# Altium PCB 四进四出三电机.PcbDoc (part 1 of 3)
Units mm, origin at the board's own origin, x right, y up, seen from the top; angles counter-clockwise.
Board outline 122.4 x 87.4 mm, 2 copper layers (Top Layer, Bottom Layer); 150 components, 163 nets, 541 pads, 64 vias.
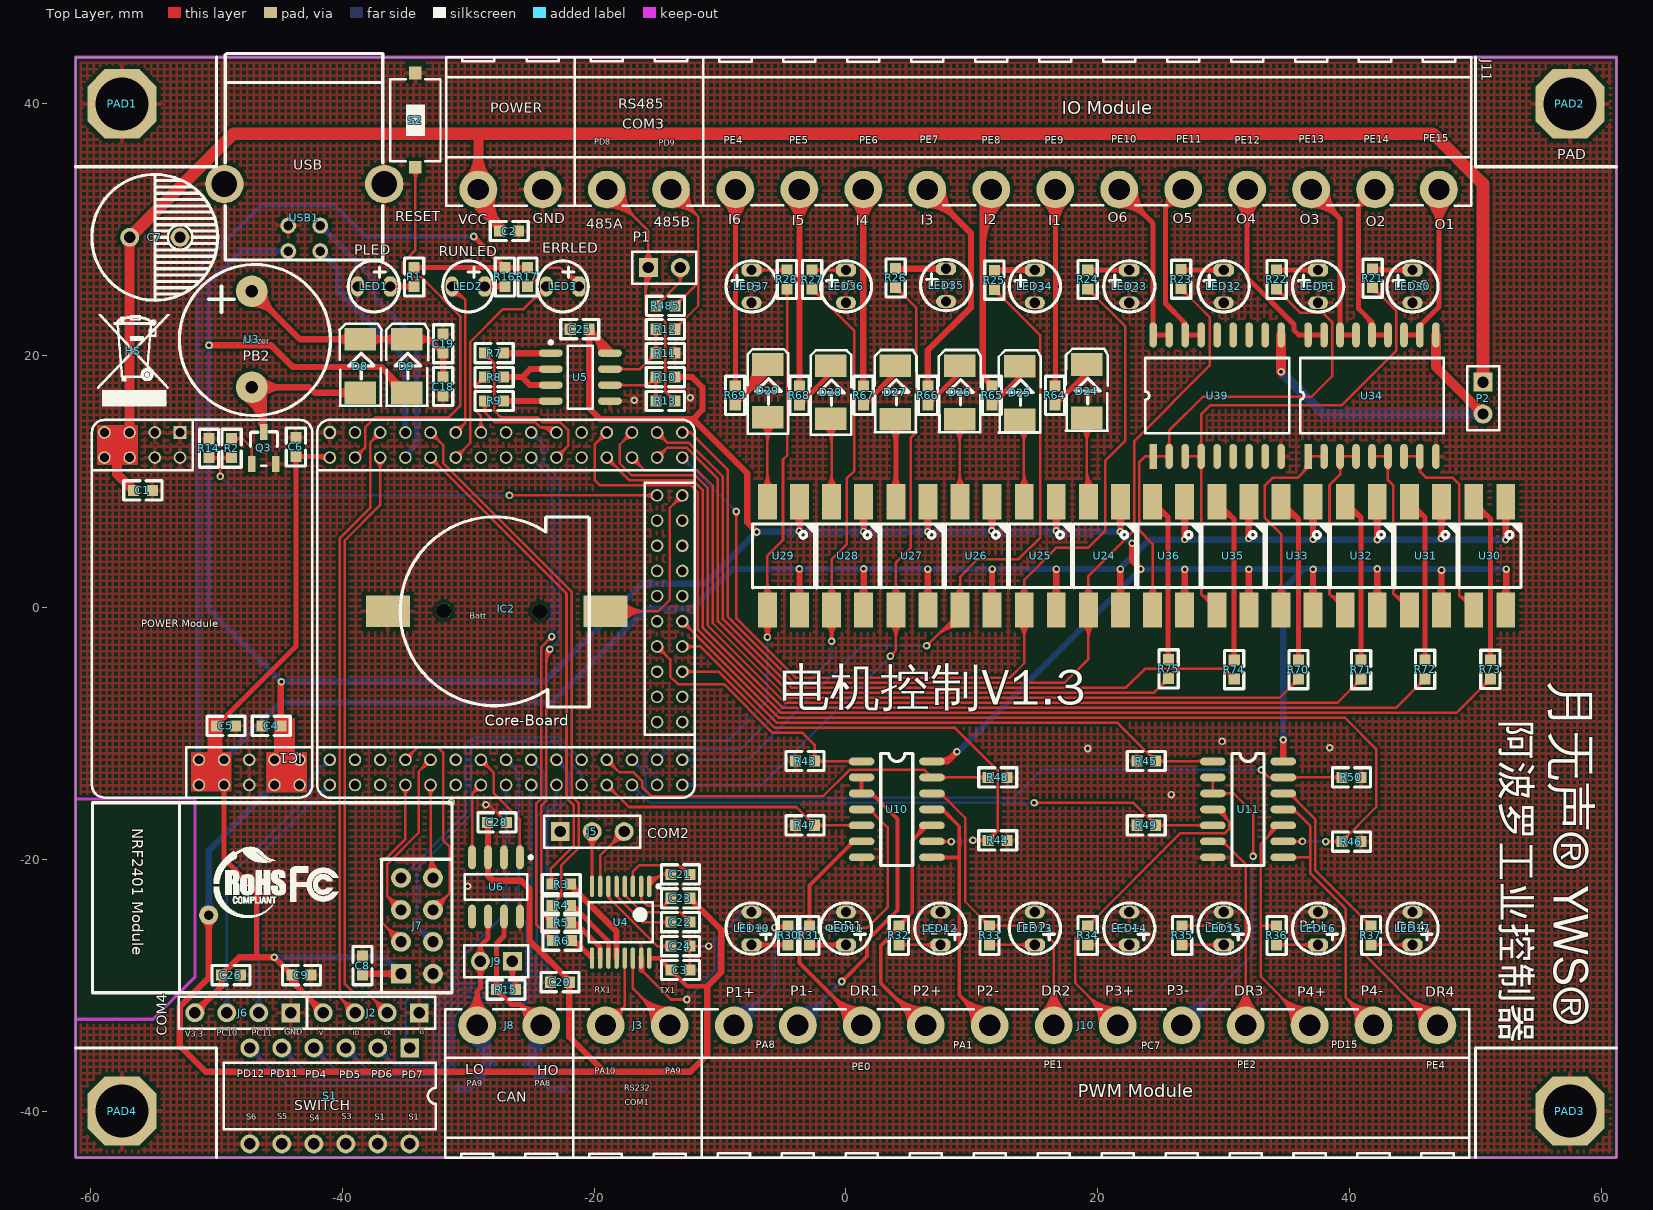
[diagram p0: Top Layer view]
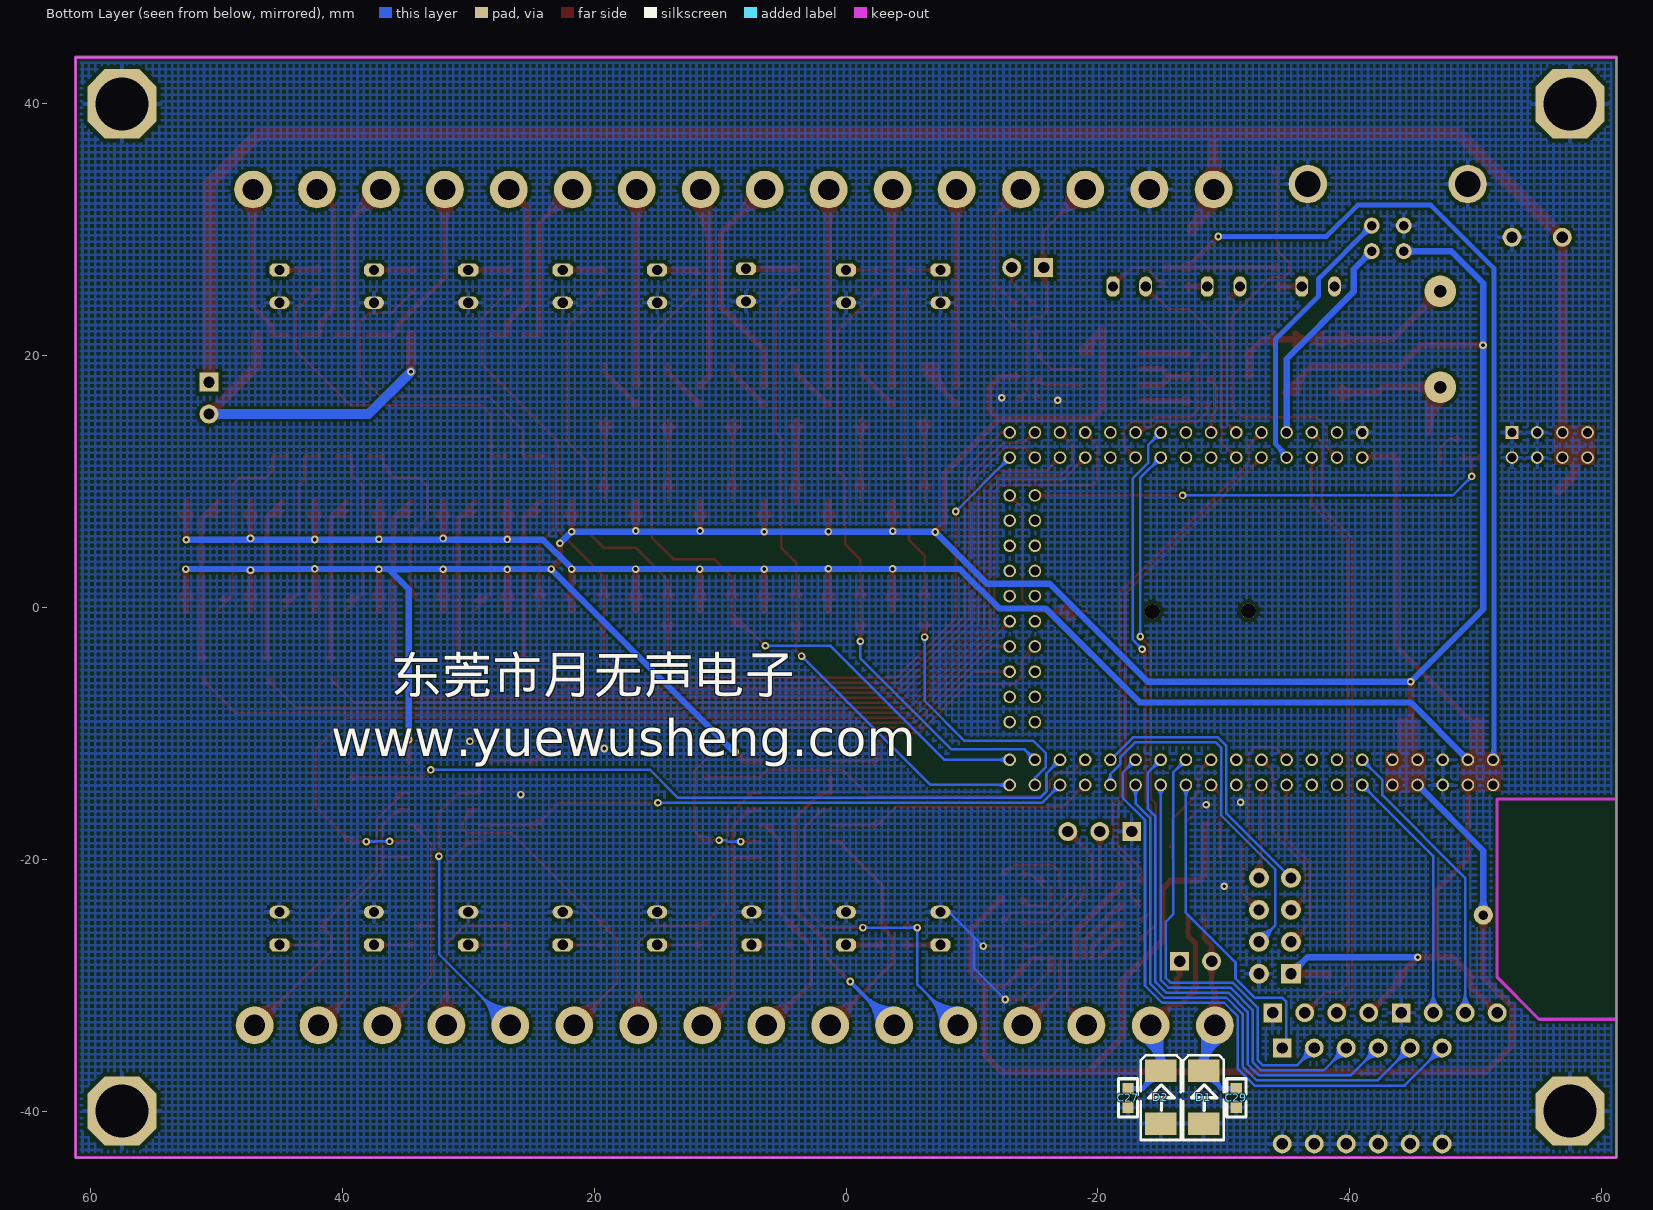
[diagram p1: Bottom Layer view, seen from below]

## Layer stack, top to bottom
Top Layer: signal copper 0.0356
Dielectric: dielectric 0.32, FR-4, Dk 4.8
Bottom Layer: signal copper 0.0356

## Board outline
-61.2,-43.7 61.2,-43.7 61.2,43.7 -61.2,43.7

## Design rules (kind name [scope] priority, off if disabled: settings)
Clearance [(InPadClass('All Pads')) vs InPolygon] p1: gap=0.3
Clearance Clearance_1 [All] p2: gap=0.2
ComponentClearance [All] p1 off: gap=0.254 collisioncheckmode=3 verticalgap=0.254 showdistances=FALSE
PlaneConnect [All] p1: planeconnectstyle=Relief reliefexpansion=0 reliefentries=4 reliefconductorwidth=0.3 reliefairgap=0.508
PolygonConnect PolygonConnect_1 [All vs IsComponentPad] p1: connectstyle=Relief reliefconductorwidth=0.3 reliefentries=4 polygonreliefangle="90 Angle" airgapwidth=0.3
PolygonConnect [All] p2: connectstyle=Direct reliefconductorwidth=0.3 reliefentries=4 polygonreliefangle="90 Angle" airgapwidth=0.3
RoomDefinition 四进四出三电机 [InComponentClass('四进四出三电机')] p1: confinementstyle=ConfineIn formatcopy=TRUE lockcomponents=FALSE outline 63,45.8 -12,45.8 -12,-45.5 63,-45.5
RoutingVias [All] p1: holewidth=0.3 width=0.6 viastyle="Through Hole" minholewidth=0.3 minwidth=0.6 maxholewidth=0.3 maxwidth=0.6
SolderMaskExpansion [All] p1: expansion=0.102
Width [All] p1: maxlimit=2 minlimit=0.16 preferedwidth=0.2 minimp=50.000000 maximp=50.000000 favimp=50.000000
26 further rules are at their usual default settings.

## Classes and differential pairs
component class 四进四出三电机: D24 D25 D26 D27 D28 D29 J10 J11 LED10 LED11 LED12 LED13 LED14 LED15 LED16 LED17 LED30 LED31 LED32 LED33 LED34 LED35 LED36 LED37 P2 R21 R22 R23 R24 R25 R26 R27 R28 R30 R31 R32 R33 R34 R35 R36 R37 R43 R44 R45 R46 R47 R48 R49 R50 R64 R65 R66 R67 R68 R69 R70 R71 R72 R73 R74 R75 U10 U11 U24 U25 U26 U27 U28 U29 U30 U31 U32 U33 U34 U35 U36 U39
component class 公共电路: Batt C1 C2 C3 C4 C5 C6 C7 C8 C9 C18 C19 C20 C21 C22 C23 C24 C25 C26 C27 C28 C29 D1 D2 D8 D9 HS IC1 IC2 J2 J3 J5 J6 J7 J8 J9 LED1 LED2 LED3 P1 PAD1 PAD2 PAD3 PAD4 Q3 R1 R2 R3 R4 R5 R6 R7 R8 R9 R10 R11 R12 R13 R14 R15 R16 R17 R485 RS485 S1 S2 U3 U4 U5 U6 usb1

## Components (designator, comment, footprint, x,y, rotation, side; value= is the part's Value field where it differs from the comment)
Batt "" MINI-BAT -19.1,-0.3 r180 top (schematic designator BATT1)
C1 "104" 0603A -56.6,9.3 r0 top
C2 "104" 0603A -27.5,29.9 r0 top
C3 "104" 0603A -13.9,-28.8 r0 top
C4 "104" 0603A -44.9,-9.4 r180 top
C5 "104" 0603A -50,-9.4 r0 top
C6 "104" 0603A -43.7,12 r90 top
C7 "680UF/50V" 电解电容10mm -56.9,29.4 r270 top
C8 "104" 0603A -38.4,-29.2 r90 top
C9 "104" 0603A -44,-29.2 r0 top
C18 "104" 0603A -32,18.3 r270 top
C19 "104" 0603A -32,20.2 r90 top
C20 "104" 0603A -21.971,-29.769 r180 top
C21 "104" 0603A -13.9,-21.2 r0 top
C22 "104" 0603A -13.9,-25 r0 top
C23 "104" 0603A -13.9,-23.1 r0 top
C24 "104" 0603A -13.9,-26.9 r0 top
C25 "104" 0603A -21.9,22.1 r0 top
C26 "104" 0603A -48.1,-29.2 r180 top
C27 "104" 0603A -22.4,-38.2 r270 bottom
C28 "104" 0603A -26.975,-17.069 r180 top
C29 "102" 0603A -31,-39.7 r90 bottom
D1 "P6KE68A" 贴片二极管#1 -28.4,-36.8 r90 bottom
D2 "P6KE6A" 贴片二极管#1 -25,-36.8 r90 bottom
D8 "RB521S" 贴片二极管#2 -38.5,22.6 r90 top
D9 "RB521S" 贴片二极管#2 -34.8,22.6 r90 top
D24 "4148" 贴片二极管#2 19.2,20.6 r90 top
D25 "4148" 贴片二极管#2 13.868,20.472 r90 top
D26 "4148" 贴片二极管#2 9.1,20.5 r90 top
D27 "4148" 贴片二极管#2 4,20.5 r90 top
D28 "4148" 贴片二极管#1 -1.2,19.2 r90 top
D29 "4148" 贴片二极管#1 -6.2,19.3 r90 top
FC "" fc -44.7,-22 r0 top
HS "" HS -56.602,20.4 r0 top
IC1 "POWER Module" 电源板 -43.4,-14.1 r270 top
IC2 "Core-Board" 核心板-物联网1 -41,13.9 r180 top
J2 "JLink" HDR1X4 -33.9,-32.2 r180 top
J3 "CON2" CON2-5.1卧 -19.1,-33.2 r180 top
J5 "COM2" HDR1X3 -22.7,-17.8 r0 top
J6 "COM4" HDR1X4 -44.1,-32.2 r180 top
J7 "NRF2401 Module" NRF24L01 -32.8,-29.1 r0 top
J8 "CAN" CON2-5.1卧 -29.3,-33.2 r180 top
J9 "" HDR1X2 -26.5,-28.1 r180 top
J10 "PWM Module" CON12-5.1卧 -8.9,-33.2 r180 top
J11 "IO Module" CON12-5.1卧 47.1,33.2 r0 top
LED1 "PLED" LED2.5 -37.5,25.5 r0 top
LED2 "RUNLED" LED2.5 -30,25.5 r0 top
LED3 "ERRLED" LED2.5 -22.5,25.5 r0 top
LED10 "P1+" LED2.5 -7.5,-25.5 r270 top (schematic designator LED18)
LED11 "DR1" LED2.5 0,-25.5 r270 top
LED12 "P2+" LED2.5 7.5,-25.5 r270 top
LED13 "DR2" LED2.5 15,-25.5 r270 top
LED14 "P3+" LED2.5 22.5,-25.5 r270 top
LED15 "DR3" LED2.5 30,-25.5 r270 top
LED16 "P4+" LED2.5 37.5,-25.5 r270 top
LED17 "DR4" LED2.5 45,-25.5 r270 top
LED30 "O5" LED2.5 45,25.5 r90 top
LED31 "O6" LED2.5 37.5,25.5 r90 top
LED32 "I1" LED2.5 30,25.5 r90 top
LED33 "I2" LED2.5 22.5,25.5 r90 top
LED34 "I3" LED2.5 15,25.5 r90 top
LED35 "I4" LED2.5 7.95,25.603 r90 top
LED36 "I5" LED2.5 0,25.5 r90 top
LED37 "I6" LED2.5 -7.5,25.5 r90 top
P1 "" HDR1X2 -15.7,27 r0 top
P2 "" HDR1X2 50.6,17.9 r270 top
PAD1 "PAD" PAD -57.5,40 r0 top
PAD2 "PAD" PAD 57.5,40 r0 top
PAD3 "PAD" PAD 57.5,-40 r0 top
PAD4 "PAD" PAD -57.5,-40 r0 top
POWER "CON2" CON2-5.1卧 -24.1,33.2 r0 top (schematic designator J1)
Q3 "9013" SOT23 -47.2,11.4 r0 top
R1 "300" 0603A -34.3,27 r270 top
R2 "1K" 0603A -48.8,11.9 r90 top
R3 "33" 0603A -23.368,-21.971 r0 top
R4 "33" 0603A -23.368,-23.673 r0 top
R5 "33" 0603A -23.368,-25.044 r0 top
R6 "33" 0603A -23.317,-26.467 r0 top
R7 "33" 0603A -28.7,20.2 r0 top
R8 "33" 0603A -28.7,18.3 r0 top
R9 "33" 0603A -28.7,16.4 r0 top
R10 "100K" 0603A -15.1,18.3 r0 top
R11 "100K" 0603A -15.1,20.2 r0 top
R12 "33" 0603A -15.1,22.1 r0 top
R13 "33" 0603A -15.1,16.4 r0 top
R14 "103" 0603A -50.6,13.4 r270 top
R15 "120" 0603A -27.762,-30.353 r0 top
R16 "160" 0603A -27.1,27 r270 top (schematic designator R38)
R17 "160" 0603A -25.3,27 r270 top (schematic designator R39)
R21 "560" 0603A 41.834,25.4 r90 top
R22 "560" 0603A 34.2,25.3 r90 top
R23 "160" 0603A 26.619,25.324 r90 top
R24 "160" 0603A 19.2,25.3 r90 top
R25 "160" 0603A 11.786,25.248 r90 top
R26 "160" 0603A 3.937,25.425 r90 top
R27 "160" 0603A -2.692,25.298 r90 top
R28 "160" 0603A -4.7,25.3 r90 top
R30 "160" 0603A -4.6,-25.3 r270 top
R31 "160" 0603A -2.9,-25.3 r270 top
R32 "160" 0603A 4.2,-25.3 r270 top
R33 "160" 0603A 11.4,-25.3 r270 top
R34 "160" 0603A 19.2,-25.3 r270 top
R35 "160" 0603A 26.7,-25.3 r270 top
R36 "160" 0603A 34.2,-25.3 r270 top
R37 "160" 0603A 41.7,-25.3 r270 top
R43 "510" 0603A -2.5,-12.2 r180 top
R44 "510" 0603A 11.3,-18.5 r0 top
R45 "510" 0603A 24.6,-12.2 r180 top
R46 "510" 0603A 39.4,-18.6 r0 top
R47 "510" 0603A -2.5,-17.3 r180 top
R48 "510" 0603A 11.3,-13.5 r0 top
R49 "510" 0603A 24.6,-17.3 r180 top
R50 "510" 0603A 39.4,-13.5 r0 top
R64 "160" 0603A 16.6,16.1 r90 top
R65 "160" 0603A 11.6,16.1 r90 top
R66 "160" 0603A 6.5,16.1 r90 top
R67 "160" 0603A 1.4,16.1 r90 top
R68 "160" 0603A -3.7,16.1 r90 top
R69 "160" 0603A -8.8,16.1 r90 top
R70 "51" 0603A 35.941,-5.69 r90 top
R71 "51" 0603A 40.919,-5.69 r90 top
R72 "51" 0603A 45.999,-5.664 r90 top
R73 "51" 0603A 51.181,-5.664 r90 top
R74 "51" 0603A 30.836,-5.69 r90 top
R75 "51" 0603A 25.625,-5.625 r90 top
R485 "120" 0603A -15.088,23.952 r0 top
RS485 "COM3" CON2-5.1卧 -13.9,33.2 r0 top (schematic designator J4)
S1 "SWITCH" DIP-12/SW -41,-38.8 r180 top
S2 "RESRT" SW-PB2 -34.2,38.7 r90 top
U3 "Buzzer" 蜂鸣器 -47.2,21.3 r90 top
U4 "SP3232" TSSOP16 -17.9,-25 r270 top
U5 "SP485" SO8_L -21.1,18.3 r0 top
U6 "TJA1050" SO8_L -27.8,-22.2 r270 top
U10 "74HC04" so-14 3.9,-15.7 r0 top
U11 "74HC04" so-14 31.8,-15.7 r0 top
U24 "TLP521" PC817 21.8,8.1 r270 top
U25 "TLP521" PC817 16.7,8.1 r270 top
U26 "TLP521" PC817 11.6,8.1 r270 top
U27 "TLP521" PC817 6.5,8.1 r270 top
U28 "TLP521" PC817 1.4,8.1 r270 top
U29 "TLP521" PC817 -3.7,8.1 r270 top
U30 "TLP521" PC817 52.4,8.1 r270 top
U31 "TLP521" PC817 47.3,8.1 r270 top
U32 "TLP521" PC817 42.2,8.1 r270 top
U33 "TLP521" PC817 37.1,8.1 r270 top
U34 "ULN2803" SOL18 36.7,12 r90 top
U35 "TLP521" PC817 32,8.1 r270 top
U36 "TLP521" PC817 26.9,8.1 r270 top
U39 "ULN2803" sol18 24.4,12 r90 top
USB1 "USB" USB-B3 -44.3,28.3 r90 top

## Footprints (in the part's own frame and the unit in brackets; to place one, negate y for a bottom-side part, rotate by r counter-clockwise, add the part's x,y. Pads: shape width x height; smd on the part's side, far side on the other; paste and mask are expansions set on the pad)
0603A [mm]
  rect 0.88x0.88 smd: 1(0,0) 2(1.5,0)
  silkscreen extent -0.76,-0.76 2.26,0.76
CON2-5.1卧 [mm]
  round 3 hole 1.7: 1(0,0) 2(-5.1,0)
  silkscreen extent -7.65,-1.28 2.55,10.5
CON12-5.1卧 [mm]
  round 3 hole 1.7: 1(0,0) 2(-5.08,0) 3(-10.16,0) 4(-15.24,0) 5(-20.32,0) 6(-25.4,0) 7(-30.48,0) 8(-35.56,0) 9(-40.64,0) 10(-45.72,0) 11(-50.8,0) 12(-55.88,0)
  silkscreen extent -58.42,-1.28 2.55,10.5
DIP-12/SW [mm] "DIP Switch; 12 Leads"
  rect 1.5x1.5 hole 0.9: 1(-6.35,-3.81)
  round 1.5 hole 0.9: 2(-3.81,-3.81) 3(-1.27,-3.81) 4(1.27,-3.81) 5(3.81,-3.81) 6(6.35,-3.81) 7(6.35,3.81) 8(3.81,3.81) 9(1.27,3.81) 10(-1.27,3.81) 11(-3.81,3.81) 12(-6.35,3.81)
  silkscreen extent -8.43,-2.65 8.41,2.65
fc [mm]
  silkscreen extent -5.53,-2.62 4.36,3
HDR1X2 [mm] "Connector; Header; 2 Position"
  rect 1.5x1.5 hole 0.9: 1(0,0)
  round 1.5 hole 0.9: 2(2.54,0)
  silkscreen extent -1.27,-1.27 3.81,1.27
HDR1X3 [mm] "Connector; Header; 3 Position"
  rect 1.5x1.5 hole 0.9: 1(0,0)
  round 1.5 hole 0.9: 2(2.54,0) 3(5.08,0)
  silkscreen extent -1.27,-1.27 6.35,1.27
HDR1X4 [mm] "Connector; Header; 4 Position"
  rect 1.5x1.5 hole 0.9: 1(0,0)
  round 1.5 hole 0.9: 2(2.54,0) 3(5.08,0) 4(7.62,0)
  silkscreen extent -1.27,-1.27 8.89,1.27
HS [mm]
  silkscreen extent -2.87,-4.39 2.87,2.87
LED2.5 [mil]
  oct 40x63 hole 32: A(51.18,0)
  oval 40x63 hole 32: K(-51.18,0)
  silkscreen extent -80,-80 80,80
MINI-BAT [mm]
  round 1.2 hole 1.2: 0(5.226,0.017) 0(12.863,-0.02)
  rect 3.5x2.5 smd: 1(-0.01,0.007) 2(17.29,0.007)
  silkscreen extent 1.29,-7.49 16.31,7.61
NRF24L01 [mil]
  round 62 hole 35: 1(0,0) 3(0,100) 4(-100,100) 5(0,200) 6(-100,200) 7(0,300) 8(-100,300)
  rect 62x62 hole 35: 2(-100,0)
  silkscreen extent -1065,-59 59,535
PAD [mm]
  oct 5.5x5.5 hole 4.2: 1(0,0)
PC817 [mm]
  rect 2.8x1.5 smd: 1(-0.3,0) 2(-0.3,-2.54) 3(8.3,-2.54) 4(8.3,0)
  silkscreen extent 1.46,-3.72 6.53,1.22
SO8_L [mm] "SOIC, 8-Leads, Body 4.9x3.9mm, Pitch 1.27mm, IPC High Density"
  oval 1.9x0.6 smd: 1(-2.35,1.905) 2(-2.35,0.635) 3(-2.35,-0.635) 4(-2.35,-1.905) 5(2.35,-1.905) 6(2.35,-0.635) 7(2.35,0.635) 8(2.35,1.905)
  silkscreen extent -2.47,-2.5 1,2.88, body extent -2,-2.5 2,2.5, height 1.75
so-14 [mil]
  oval 80x24 smd: 1(-104.65,136.54) 2(-104.65,86.54) 3(-104.65,36.54) 4(-104.65,-13.46) 5(-104.65,-63.46) 6(-104.65,-113.46) 7(-104.65,-163.46) 8(115.35,-163.46) 9(115.35,-113.46) 10(115.35,-63.46) 11(115.35,-13.46) 12(115.35,36.54) 13(115.35,86.54) 14(115.35,136.54)
  silkscreen extent -45,-188 55,162
SOL18 [mm]
  rect 2x0.6 smd: 1(0,0)
  oval 2x0.6 smd: 2(0,-1.27) 3(0,-2.54) 4(0,-3.81) 5(0,-5.08) 6(0,-6.35) 7(0,-7.62) 8(0,-8.89) 9(0,-10.16) 10(9.65,-10.16) 11(9.65,-8.89) 12(9.65,-7.62) 13(9.65,-6.35) 14(9.65,-5.08) 15(9.65,-3.81) 16(9.65,-2.54) 17(9.65,-1.27) 18(9.65,0)
  silkscreen extent 1.83,-10.8 7.82,0.64
sol18 [mm]
  rect 2x0.6 smd: 1(0,0)
  oval 2x0.6 smd: 2(0,-1.27) 3(0,-2.54) 4(0,-3.81) 5(0,-5.08) 6(0,-6.35) 7(0,-7.62) 8(0,-8.89) 9(0,-10.16) 10(9.65,-10.16) 11(9.65,-8.89) 12(9.65,-7.62) 13(9.65,-6.35) 14(9.65,-5.08) 15(9.65,-3.81) 16(9.65,-2.54) 17(9.65,-1.27) 18(9.65,0)
  silkscreen extent 1.83,-10.79 7.82,0.64
SOT23 [mm]
  rect 0.6x1.27 smd: 1(0,0) 2(1.905,0) 3(0.965,2.54)
  silkscreen extent -0.11,-0.13 2.04,2.56, body extent -0.5,0.43 2.42,2.15, height 1.5
SW-PB2 [mm]
  rect 1x1 smd: 1(-3.75,0) 2(3.75,0)
  silkscreen extent -3.25,-2 3.25,2
TSSOP16 [mm] "TSOP, 16-Leads, Body 5x4.4mm, Pitch 0.65mm, IPC Medium Density"
  oval 1.7x0.35 smd: 1(-2.85,2.275) 2(-2.85,1.625) 3(-2.85,0.975) 4(-2.85,0.325) 5(-2.85,-0.325) 6(-2.85,-0.975) 7(-2.85,-1.625) 8(-2.85,-2.275) 9(2.85,-2.275) 10(2.85,-1.625) 11(2.85,-0.975) 12(2.85,-0.325) 13(2.85,0.325) 14(2.85,0.975) 15(2.85,1.625) 16(2.85,2.275)
  silkscreen extent -2.97,-2.55 1.6,3.13, body extent -2.25,-2.55 2.25,2.55, height 1.1
USB-B3 [mil]
  round 50 hole 30: 1(0,0) 2(0,-100) 3(80,-100) 4(80,0)
  round 120 hole 80: 5(210,200) 6(210,-300)
  silkscreen extent -28,-295 618,197
核心板-物联网1 [mm]
  oct 1x1 hole 0.7: 1(0,0)
  round 1 hole 0.7: 2(0,2) 3(-2,0) 4(-2,2) 5(-4,0) 6(-4,2) 7(-6,0) 8(-6,2) 9(-8,0) 10(-8,2) 11(-10,0) 12(-10,2) 13(-12,0) 14(-12,2) 15(-14,0) 16(-14,2) 17(-16,0) 18(-16,2) 19(-18,0) 20(-18,2) 21(-20,0) 22(-20,2) 23(-22,0) 24(-22,2) 25(-24,0) 26(-24,2) 27(-26,0) 28(-26,2) 29(-28,0) 30(-28,2) 31(-26,5) 32(-28,5) 33(-26,7) 34(-28,7) 35(-26,9) 36(-28,9) 37(-26,11) 38(-28,11) 39(-26,13) 40(-28,13) 41(-26,15) 42(-28,15) 43(-26,17) 44(-28,17) 45(-26,19) 46(-28,19) 47(-26,21) 48(-28,21) 49(-26,23) 50(-28,23) 51(-28,26) 52(-28,28) 53(-26,26) 54(-26,28) 55(-24,26) 56(-24,28) 57(-22,26) 58(-22,28) 59(-20,26) 60(-20,28) 61(-18,26) 62(-18,28) 63(-16,26) 64(-16,28) 65(-14,26) 66(-14,28) 67(-12,26) 68(-12,28) 69(-10,26) 70(-10,28) 71(-8,26) 72(-8,28) 73(-6,26) 74(-6,28) 75(-4,26) 76(-4,28) 77(-2,26) 78(-2,28) 79(0,26) 80(0,28)
  silkscreen extent -29,-1 1,29
电源板 [mm]
  round 1 hole 0.7: 1(-2,0) 1(-2,-2) 1(0,0) 1(0,-2) 2(-2,-4) 2(0,-4) 3(-2,-6) 3(-2,-8) 3(0,-6) 3(0,-8) 4(-28,-11.5) 4(-26,-11.5) 4(-26,-9.5) 6(-28,-15.5) 6(-28,-13.5) 6(-26,-15.5) 6(-26,-13.5)
  rect 1x1 hole 0.7: 5(-28,-9.5)
  silkscreen extent -29,-16.5 1,1
电解电容10mm [mm]
  round 1.5 hole 0.9: 1(0,0) 2(0,4)
  silkscreen extent -5,-3 5,7
蜂鸣器 [mm]
  round 2.5 hole 1: 1(3.81,0) 2(-3.81,0)
  silkscreen extent -6.06,-6.25 5.94,5.75
贴片二极管#1 [mm]
  rect 1.8x2.5 smd: A(-4.2,0) K(0,0)
  silkscreen extent -5.5,-1.6 1.22,1.6
贴片二极管#2 [mm]
  rect 1.8x2.5 smd: A(-5.55,0.075) K(-1.3,0.075)
  silkscreen extent -6.58,-1.61 -0.05,1.73

## Part data
Batt: library part Battery, "XH414H"
C1 C2 C3 C4 C5 C6 C8 C9 C18 C19 C20 C21 C22 C23 C24 C25 C26 C27 C28 C29: library part CAP, "Capacitor"
C7: library part "CAPACITOR POL", "Capacitor"
D1 D2 D8 D9 D24 D25 D26 D27 D28 D29: library part 二极管
FC HS: library part PAD
IC1: library part 电源板
IC2: library part 物联网核心板
J2: library part CON4
J5: library part "Header 3", "Header, 3-Pin"
J6: library part "Header 4", "Header, 4-Pin"
J7: library part NRF2401模块
J8 RS485: library part CON2
J9 P1 P2: library part "Header 2", "Header, 2-Pin"
J10 J11: library part "Header 12", "Header, 12-Pin"
LED1 LED2 LED3 LED10 LED11 LED12 LED13 LED14 LED15 LED16 LED17 LED30 LED31 LED32 LED33 LED34 LED35 LED36 LED37: library part LED
Q3: library part NPN
R1 R2 R3 R4 R5 R6 R7 R8 R9 R10 R11 R12 R13 R14 R15 R16 R17 R485: library part RES2
R21 R22 R23 R24 R25 R26 R27 R28 R30 R31 R32 R33 R34 R35 R36 R37 R43 R44 R45 R46 R47 R48 R49 R50 R64 R65 R66 R67 R68 R69 R70 R71 R72 R73 R74 R75: library part Res2, "Resistor"
S1: library part "SW DIP-6", "DIP Switch, 6 Position, SPST"
S2: library part SW-PB
U3: library part 蜂鸣器
U4: library part SP3232EEA
U24 U25 U26 U27 U28 U29 U30 U31 U32 U33 U35 U36: library part TLP521-1, "Single NPN PhotoTransistor OptoCoupler."
USB1: library part "HEADER 3X2"

## Free pads (board coordinates)
  round 1.524 hole 0.762: 0(-50.622,-24.435)

## Via types
v1: diameter 0.6, hole 0.3, Top Layer to Bottom Layer, 64 vias

## Nets (pads, with @x,y where several pads share a name; then routed paths per layer and width w, separated by ;. In a path a pad name is that pad's centre, name@x,y a point inside that pad or via, vN(x,y) a via of type N, cw(c..) or ccw(c..) an arc to the next point about the centre after c; other vN are vias at no path point)
485A: P1.1 R13.2 RS485.2 | length 46.9
  Top Layer w0.2: RS485.2@-19,31.8 cw(c-19,28.42) -16.61,30.81 cw(c-14.22,33.2) RS485.2@-17.6,33.2 ; RS485.2@-19,32 cw(c-19,29.103) -16.951,31.151 cw(c-14.903,33.2) RS485.2@-17.8,33.2 ; RS485.2@-19,32.2 cw(c-19,29.786) -17.293,31.493 cw(c-15.586,33.2) RS485.2@-18,33.2 ; RS485.2@-19,32.4 cw(c-19,30.469) -17.634,31.834 cw(c-16.269,33.2) RS485.2@-18.2,33.2 ; RS485.2@-19,33.2 -15.7,29.9 P1.1@-15.7,27 -15.926,26.774 -15.926,23.444 -15.57,23.089 -14.764,23.089 -14.34,22.664 -14.34,18.884 -14.36,18.864 -14.36,17.16 R13.2@-13.6,16.4 ; P1.1@-16.16,26.54 cw(c-16.724,25.976) -15.926,25.976 ; P1.1@-16.16,27.46 ccw(c-17.269,28.569) -15.7,28.569 ccw(c-14.131,28.569) P1.1@-15.24,27.46 ; P1.1@-16.018,27.318 ccw(c-16.786,28.086) -15.7,28.086 ccw(c-14.614,28.086) P1.1@-15.382,27.318 ; -15.926,24.886 cw(c-13.586,24.886) P1.1@-15.24,26.54 ; -15.926,25.369 cw(c-14.069,25.369) P1.1@-15.382,26.682 ; -15.926,25.851 cw(c-14.551,25.851) P1.1@-15.523,26.823 ; R13.2@-13.94,16.4 ccw(c-14.761,16.4) -14.18,16.98 ccw(c-13.6,17.561) R13.2@-13.6,16.74
485B: R12.2 R485.2 RS485.1 | length 32.2
  Top Layer w0.2: RS485.1@-13.9,33.2 -11.735,31.035 ; RS485.1@-13.842,32.402 cw(c-13.733,30.893) -12.663,31.963 cw(c-11.593,33.033) RS485.1@-13.102,33.142 ; RS485.1@-13.828,32.203 cw(c-13.691,30.316) -12.354,31.654 cw(c-11.016,32.991) RS485.1@-12.903,33.128 ; RS485.1@-13.813,32.003 cw(c-13.649,29.739) -12.044,31.344 cw(c-10.439,32.949) RS485.1@-12.703,33.113 ; RS485.1@-13.799,31.804 cw(c-13.608,29.162) -11.735,31.035 ; R12.2@-13.6,22.1 -11.735,23.965 -11.735,25.781 ; R12.2@-13.6,22.44 ccw(c-13.6,23.261) -13.02,22.68 ccw(c-12.439,22.1) R12.2@-13.26,22.1 ; R485.2@-13.588,23.952 -11.759,25.781 -11.735,25.781 ; R485.2@-13.588,24.292 ccw(c-13.588,25.113) -13.007,24.533 ccw(c-12.427,23.952) R485.2@-13.248,23.952 ; RS485.1@-12.504,33.099 ccw(c-9.862,32.908) -11.735,31.035 ; -11.735,25.781 -11.735,31.035
+3.3V: C5.1 C6.1 C8.1 C9.1 C26.2 IC1.3 IC2.2 J2.4 J6.4 J7.2 R1.1 R16.1 R17.1 U24.4 U25.4 U26.4 U27.4 U28.4 U29.4 U30.1 U31.1 U32.1 U33.1 U35.1 U36.1 | length 356.9
  Top Layer w0.4: IC1.3@-51.4,-14.1 -50.4,-13.1 ; IC1.3@-51.4,-13.8 ccw(c-51.4,-13.076) -50.888,-13.588 ccw(c-50.376,-14.1) IC1.3@-51.1,-14.1 ; IC1.3@-51.4,-12.4 cw(c-51.4,-13.124) -50.888,-12.612 cw(c-50.376,-12.1) IC1.3@-51.1,-12.1 ; IC1.3@-51.4,-12.1 -50.4,-13.1 ; -50.4,-10.945 cw(c-48.455,-10.945) C5.1@-49.83,-9.57 ; -50.4,-9.979 cw(c-49.421,-9.979) C5.1@-50.113,-9.287 ; C5.1@-50,-9.16 ccw(c-50,-8.581) -49.59,-8.99 ccw(c-49.181,-9.4) C5.1@-49.76,-9.4 ; IC1.3@-49.7,-14.1 ccw(c-50.424,-14.1) -49.912,-13.588 ccw(c-49.4,-13.076) IC1.3@-49.4,-13.8 ; IC1.3@-49.7,-12.1 cw(c-50.424,-12.1) -49.912,-12.612 cw(c-49.4,-13.124) IC1.3@-49.4,-12.4 ; IC1.3@-49.612,-14.312 cw(c-50.124,-14.824) -49.4,-14.824 cw(c-48.676,-14.824) IC1.3@-49.188,-14.312 ; IC1.3@-49.476,-14.151 -49.476,-14.024 -50.4,-13.1 ; IC1.3@-49.4,-14.1 -49.4,-19.967 -46.808,-22.559 -46.808,-27.788 ; IC1.3@-49.4,-12.1 -50.4,-13.1 ; C6.1@-43.87,11.83 cw(c-44.279,11.421) -43.7,11.421 cw(c-43.121,11.421) -43.53,11.83 cw(c-43.121,11.421) -43.121,12 cw(c-43.121,12.579) C6.1@-43.53,12.17 ; -41.966,12 cw(c-41.966,10.934) IC2.2@-41.212,11.688 ; IC2.2@-41.1,12 C6.1@-43.7,12 -43.7,-3.1 C5.1@-50,-9.4 -50.4,-9.8 -50.4,-13.1 ; R1.1@-34.3,27 R16.1@-27.33,27 ; R1.1@-34.13,26.83 cw(c-33.721,26.421) -33.721,27 cw(c-33.721,27.579) R1.1@-34.13,27.17 ; v1(-29.565,29.465) R16.1@-27.1,27 R17.1@-25.3,27 ; R16.1@-27.34,27 ccw(c-27.919,27) -27.51,27.41 ccw(c-27.1,27.819) R16.1@-27.1,27.24 ; R16.1@-27.27,26.83 ccw(c-27.679,26.421) -27.679,27 ccw(c-27.679,27.579) R16.1@-27.27,27.17 ; R16.1@-26.93,26.83 cw(c-26.521,26.421) -26.521,27 cw(c-26.521,27.579) R16.1@-26.93,27.17 ; R17.1@-25.47,26.83 ccw(c-25.879,26.421) -25.879,27 ccw(c-25.879,27.579) R17.1@-25.47,27.17
  Top Layer w0.5: J6.4@-51.72,-32.2 -49.6,-30.08 C26.2@-49.6,-29.2 ; J6.4@-51.72,-31.7 ccw(c-51.72,-30.493) -50.866,-31.346 ccw(c-50.013,-32.2) J6.4@-51.22,-32.2 ; C26.2@-49.734,-29.334 cw(c-50.059,-29.659) -49.6,-29.659 cw(c-49.141,-29.659) C26.2@-49.466,-29.334 ; C26.2@-49.608,-29.192 -48.204,-27.788 -46.808,-27.788 v1(-45.412,-27.788) C9.1@-44,-29.2 -44,-29.72 J2.4@-41.52,-32.2 ; C26.2@-49.41,-29.2 cw(c-48.912,-29.2) C26.2@-49.264,-28.848 ; C9.1@-44.19,-29.2 ccw(c-44.649,-29.2) -44.324,-28.876 ccw(c-44,-28.551) C9.1@-44,-29.01 ; C9.1@-44.134,-29.334 cw(c-44.459,-29.659) -44,-29.659 cw(c-43.541,-29.659) C9.1@-43.866,-29.334 ; C9.1@-43.81,-29.2 ccw(c-42.096,-29.2) -43.308,-30.412 ; J2.4@-42.02,-32.2 ccw(c-43.227,-32.2) -42.374,-31.346 ccw(c-41.52,-30.493) J2.4@-41.52,-31.7 ; C8.1@-38.4,-29.1 J7.2@-35.34,-29.1 ; C8.1@-38.266,-29.334 cw(c-37.7,-29.9) -37.7,-29.1 ; J7.2@-35.72,-29.48 ccw(c-36.637,-30.397) -36.637,-29.1 ccw(c-36.637,-27.803) J7.2@-35.72,-28.72 ; U29.4@-4.054,0.804 ccw(c-4.907,1.657) -3.7,1.657 ccw(c-2.493,1.657) U29.4@-3.346,0.804 ; U29.4@-3.7,-0.2 v1(-3.7,3.065) ; U28.4@1.046,0.804 ccw(c0.193,1.657) 1.4,1.657 ccw(c2.607,1.657) U28.4@1.754,0.804 ; U28.4@1.4,-0.2 v1(1.4,3.07) ; U27.4@6.146,0.804 ccw(c5.293,1.657) 6.5,1.657 ccw(c7.707,1.657) U27.4@6.854,0.804 ; U27.4@6.5,-0.2 v1(6.5,3.046) ; U26.4@11.246,0.804 ccw(c10.393,1.657) 11.6,1.657 ccw(c12.807,1.657) U26.4@11.954,0.804 ; U26.4@11.6,-0.2 11.6,3.04 v1(11.608,3.048) ; U25.4@16.346,0.804 ccw(c15.493,1.657) 16.7,1.657 ccw(c17.907,1.657) U25.4@17.054,0.804 ; U25.4@16.7,-0.2 16.7,3.035 v1(16.713,3.048) ; U24.4@21.446,0.804 ccw(c20.609,1.641) 21.793,1.641 ; 21.793,1.673 ccw(c23.023,1.673) U24.4@22.154,0.804 ; v1(21.793,3.048) 21.793,-0.193 U24.4@21.8,-0.2 ; U36.1@26.546,7.396 cw(c25.693,6.543) 26.9,6.543 cw(c28.107,6.543) U36.1@27.254,7.396 ; v1(26.9,5.409) U36.1@26.9,8.4 ; U35.1@31.646,7.396 cw(c30.793,6.543) 32,6.543 cw(c33.207,6.543) U35.1@32.354,7.396 ; v1(32,5.482) U35.1@32,8.4 ; U33.1@36.746,7.396 cw(c35.893,6.543) 37.1,6.543 cw(c38.307,6.543) U33.1@37.454,7.396 ; v1(37.1,5.42) U33.1@37.1,8.4 ; U32.1@41.846,7.396 cw(c40.993,6.543) 42.2,6.543 cw(c43.407,6.543) U32.1@42.554,7.396 ; v1(42.2,5.4) U32.1@42.2,8.4 ; U31.1@46.946,7.396 cw(c46.093,6.543) 47.3,6.543 cw(c48.507,6.543) U31.1@47.654,7.396 ; v1(47.3,5.481) U31.1@47.3,8.4 ; U30.1@52.046,7.396 cw(c51.193,6.543) 52.4,6.543 cw(c53.607,6.543) U30.1@52.754,7.396 ; v1(52.4,5.385) U30.1@52.4,8.4
  Bottom Layer w0.4: IC1.3@-51.612,-11.888 ccw(c-51.978,-11.522) -51.46,-11.522 ; -51.46,-11.23 ccw(c-50.53,-11.23) IC1.3@-51.188,-11.888 ; IC1.3@-51.4,-12.1 -51.46,-12.04 -51.46,26.949 -46.457,31.953 -40.64,31.953 -38.152,29.465 v1(-29.565,29.465)
  Bottom Layer w0.5: IC1.3@-49.4,-12.1 -44.844,-7.544 -23.317,-7.544 -15.85,-0.076 -12.167,-0.076 -9.042,3.048 v1@6.502,3.048 ; IC1.3@-49.4,-11.85 ccw(c-49.4,-11.246) -48.973,-11.673 ccw(c-48.546,-12.1) IC1.3@-49.15,-12.1 ; v1(-45.412,-27.788) -36.652,-27.788 J7.2@-35.34,-29.1 ; J7.2@-35.877,-29.1 ccw(c-37.175,-29.1) -36.257,-28.183 ccw(c-35.34,-27.265) J7.2@-35.34,-28.563 ; v1(6.5,3.046) v1@6.502,3.048 ; v1(26.9,5.409) v1@26.924,5.385 ; 31.644,5.385 ccw(c31.644,5.838) v1@31.965,5.518 ; v1@31.953,5.385 v1@26.924,5.385 ; v1@32,5.385 v1@37.135,5.385 ; v1@32.035,5.518 ccw(c32.356,5.838) 32.356,5.385 ; v1(37.1,5.42) v1@37.135,5.385 ; v1(42.2,5.4) v1@42.215,5.385 ; 46.947,5.385 ccw(c46.947,5.834) v1@47.265,5.517 ; v1@47.3,5.385 v1@42.215,5.385 ; v1(47.3,5.481) v1@47.346,5.436 ; v1@47.335,5.517 ccw(c47.653,5.834) 47.653,5.385 ; v1@47.346,5.385 v1(52.4,5.385) ; v1@6.502,3.048 v1(11.608,3.048) v1(16.713,3.048) v1(21.793,3.048) 21.793,3.099 24.079,5.385 v1@26.924,5.385 ; v1@37.135,5.385 v1@42.215,5.385
+5V: C3.1 C4.1 C20.1 C23.2 C25.2 C28.2 D9.A IC1.1 pad.0 R10.2 U4.16 U5.8 U6.3 U10.14 U11.14 U24.1 U25.1 U26.1 U27.1 U28.1 U29.1 U30.4 U31.4 U32.4 U33.4 U35.4 U36.4 USB1.1 | length 446
  Top Layer w0.35: U4.16@-15.625,-27.85 -14.85,-27.85 C3.1@-13.9,-28.8 -12.601,-30.099 -11.024,-30.099 ; C3.1@-14.165,-28.8 ccw(c-14.805,-28.8) -14.352,-28.348 ccw(c-13.9,-27.895) C3.1@-13.9,-28.535 ; C3.1@-13.9,-29.065 cw(c-13.9,-29.705) -13.448,-29.252 cw(c-12.995,-28.8) C3.1@-13.635,-28.8
  Top Layer w0.5: pad.0@-50.984,-24.797 cw(c-51.858,-25.671) -50.622,-25.671 cw(c-49.386,-25.671) pad.0@-50.26,-24.797 ; pad.0@-50.622,-24.435 -50.622,-29.413 -52.209,-31 -52.217,-31 -52.92,-31.703 -52.92,-34.812 -50.851,-36.881 -19.202,-36.881 ; v1(-50.597,20.828) -45.669,20.828 -43.942,19.101 -36.926,19.101 D9.A@-34.875,17.05 ; IC1.1@-45.4,-14.1 -44.4,-13.1 ; IC1.1@-45.4,-13.85 ccw(c-45.4,-13.246) -44.973,-13.673 ccw(c-44.546,-14.1) IC1.1@-45.15,-14.1 ; IC1.1@-45.4,-12.35 cw(c-45.4,-12.954) -44.973,-12.527 cw(c-44.546,-12.1) IC1.1@-45.15,-12.1 ; IC1.1@-45.4,-12.1 -44.4,-13.1 ; C4.1@-45.034,-9.534 cw(c-46.566,-11.066) -44.4,-11.066 ; C4.1@-45.034,-9.266 ccw(c-45.359,-8.941) -44.9,-8.941 ; C4.1@-44.905,-9.59 cw(c-44.917,-10.107) -44.4,-10.107 ; C4.1@-44.9,-9.59 cw(c-44.9,-10.049) -44.576,-9.724 cw(c-44.251,-9.4) C4.1@-44.71,-9.4 ; -44.9,-8.941 ccw(c-44.441,-8.941) C4.1@-44.766,-9.266 ; v1(-44.845,-5.904) -44.9,-5.959 C4.1@-44.9,-9.4 -44.4,-9.9 -44.4,-13.1 ; C4.1@-44.681,-9.181 cw(c-45.359,-9.859) -44.4,-9.859 ; IC1.1@-43.65,-14.1 ccw(c-44.254,-14.1) -43.827,-13.673 ccw(c-43.4,-13.246) IC1.1@-43.4,-13.85 ; IC1.1@-43.65,-12.1 cw(c-44.254,-12.1) -43.827,-12.527 cw(c-43.4,-12.954) IC1.1@-43.4,-12.35 ; IC1.1@-43.4,-14.1 -44.4,-13.1 ; IC1.1@-43.4,-12.1 -44.4,-13.1 ; -36.582,18.757 cw(c-38.289,17.05) D9.A@-35.875,17.05 ; D9.A@-35.737,17.912 ccw(c-35.225,18.424) D9.A@-35.225,17.7 ; D9.A@-35.729,17.904 cw(c-36.582,17.05) D9.A@-35.375,17.05 ; C28.2@-28.609,-17.203 cw(c-29.03,-17.624) -28.435,-17.624 ; C28.2@-28.435,-17.165 U6.3@-28.435,-19.85 -28.435,-21.324 -28.042,-21.717 -25.781,-21.717 -25.145,-22.353 -25.145,-26.453 -21.971,-29.627 C20.1@-21.971,-29.769 -21.971,-34.112 -19.202,-36.881 ; -22.396,-29.202 cw(c-22.963,-29.769) C20.1@-22.161,-29.769 ; C20.1@-22.105,-29.903 cw(c-22.43,-30.227) -21.971,-30.227 cw(c-21.512,-30.227) C20.1@-21.837,-29.903 ; C25.2@-20.534,21.966 cw(c-20.859,21.641) -20.4,21.641 cw(c-19.941,21.641) C25.2@-20.266,21.966 ; C25.2@-20.4,21.91 cw(c-20.4,21.451) -20.076,21.776 cw(c-19.751,22.1) C25.2@-20.21,22.1 ; C25.2@-20.118,21.818 cw(c-21.732,20.205) U5.8@-19.45,20.205 ; -19.265,20.965 cw(c-20.024,20.205) U5.8@-18.95,20.205 ; U5.8@-18.75,20.205 -18.75,20.45 C25.2@-20.4,22.1 -20.4,15.828 -19.533,14.961 -12.141,14.961 ; R10.2@-13.6,18.3 -12.204,18.3 -11.405,17.501 -11.405,15.697 -12.141,14.961 ; R10.2@-13.466,18.166 cw(c-13.141,17.841) -13.141,18.3 cw(c-13.141,18.759) R10.2@-13.466,18.434 ; C23.2@-12.4,-23.29 cw(c-12.4,-23.749) -12.076,-23.424 cw(c-11.751,-23.1) C23.2@-12.21,-23.1 ; C23.2@-12.4,-23.1 -9.906,-25.594 -9.906,-28.981 -11.024,-30.099 -11.024,-35.535 -12.37,-36.881 -19.202,-36.881 ; v1(-7.087,5.994) -7.849,6.756 -7.849,10.668 -12.141,14.961 ; U29.1@-4.054,7.396 cw(c-4.907,6.543) -3.7,6.543 cw(c-2.493,6.543) U29.1@-3.346,7.396 ; v1(-3.708,6.071) -3.7,6.079 U29.1@-3.7,8.4 ; U28.1@1.046,7.396 cw(c0.193,6.543) 1.4,6.543 cw(c2.607,6.543) U28.1@1.754,7.396 ; v1(1.4,6.023) U28.1@1.4,8.4 ; U27.1@6.146,7.396 cw(c5.293,6.543) 6.5,6.543 cw(c7.707,6.543) U27.1@6.854,7.396 ; v1(6.5,6.022) U27.1@6.5,8.4 ; U10.14@6.83,-12.232 8.037,-12.232 v1(8.814,-11.455) ; U10.14@7.541,-12.177 ccw(c7.541,-10.847) 8.481,-11.788 ; U26.1@11.246,7.396 cw(c10.393,6.543) 11.6,6.543 cw(c12.807,6.543) U26.1@11.954,7.396 ; v1(11.59,6.078) 11.6,6.078 U26.1@11.6,8.4 ; U25.1@16.346,7.396 cw(c15.493,6.543) 16.7,6.543 cw(c17.907,6.543) U25.1@17.054,7.396 ; v1(16.7,6.083) U25.1@16.7,8.4 ; U24.1@21.446,7.396 cw(c20.593,6.543) 21.8,6.543 cw(c23.007,6.543) U24.1@22.154,7.396 ; v1(21.8,6.013) U24.1@21.8,8.4 ; v1(22.721,5.092) 22.721,3.746 v1(23.419,3.048) ; U36.4@26.546,0.804 ccw(c25.693,1.657) 26.9,1.657 ccw(c28.107,1.657) U36.4@27.254,0.804 ; U36.4@26.9,-0.2 v1(26.9,3.021) ; U35.4@31.646,0.804 ccw(c30.793,1.657) 32,1.657 ccw(c33.207,1.657) U35.4@32.354,0.804 ; U35.4@32,-0.2 v1(32,3.027) ; U11.14@34.73,-12.232 v1(34.73,-10.507) ; U33.4@36.746,0.804 ccw(c35.893,1.657) 37.1,1.657 ccw(c38.307,1.657) U33.4@37.454,0.804 ; U33.4@37.1,-0.2 v1(37.1,3.039) ; U32.4@41.846,0.804 ccw(c40.993,1.657) 42.2,1.657 ccw(c43.407,1.657) U32.4@42.554,0.804 ; U32.4@42.2,-0.2 v1(42.2,3.063) ; U31.4@46.946,0.804 ccw(c46.093,1.657) 47.3,1.657 ccw(c48.507,1.657) U31.4@47.654,0.804 ; U31.4@47.3,-0.2 v1(47.3,2.967) ; U30.4@52.046,0.804 ccw(c51.07,1.78) 52.451,1.78 ; U30.4@52.4,-0.2 52.451,-0.149 v1(52.451,3.048) ; 52.451,1.534 ccw(c53.484,1.534) U30.4@52.754,0.804
  Bottom Layer w0.5: pad.0@-50.984,-24.073 ccw(c-51.858,-23.199) -50.622,-23.199 ccw(c-49.386,-23.199) pad.0@-50.26,-24.073 ; pad.0@-50.622,-24.435 -50.622,-19.322 IC1.1@-45.4,-14.1 ; v1(-50.597,20.828) v1@-50.622,20.853 ; IC1.1@-45.65,-14.1 cw(c-46.254,-14.1) -45.827,-14.527 cw(c-45.4,-14.954) IC1.1@-45.4,-14.35 ; USB1.1@-44.572,28.028 ccw(c-45.229,27.371) -45.229,28.3 ccw(c-45.229,29.229) USB1.1@-44.572,28.572 ; USB1.1@-44.3,28.3 -48.078,28.3 -50.622,25.756 v1@-50.622,20.853 ; v1@1.397,6.013 -7.067,6.013 -7.086,5.994 -11.201,1.88 -16.179,1.88 -23.963,-5.904 v1(-44.845,-5.904) -50.622,-0.127 v1@-50.622,20.853 ; v1@1.4,6.013 v1@6.5,6.013 ; v1@6.502,6.013 v1@16.688,6.013 ; v1(8.814,-11.455) 8.915,-11.455 v1(23.419,3.048) v1@26.899,3.048 ; v1@8.814,-11.405 ccw(c8.814,-11.039) 9.073,-11.298 ; v1@16.7,6.013 v1(21.8,6.013) v1(22.721,5.092) ; v1@26.9,3.048 v1@31.979,3.048 ; v1@32,3.048 34.747,3.048 34.73,3.031 36.313,3.031 ; v1(34.73,-10.507) 34.73,1.448 36.313,3.031 ; v1@37.1,3.048 36.33,3.048 36.313,3.031 ; v1@37.109,3.048 v1@47.295,3.048 ; 46.983,3.048 cw(c46.983,2.649) v1@47.265,2.931 ; v1@47.3,3.048 v1(52.451,3.048) ; v1@47.335,2.931 cw(c47.617,2.649) 47.617,3.048
ADC1: IC2.33
ADC2: IC2.34
ADC3: IC2.35
ADC4: IC2.36
ADC5: IC2.48
ADC6: IC2.47
ADC7: IC2.50
ADC8: IC2.49
BEEP: IC2.31 R2.1 R14.2 | length 45.7
  Top Layer w0.2: R14.2@-50.6,11.9 -49.7,11.9 ; R14.2@-50.36,11.66 cw(c-49.779,11.079) -49.779,11.9 cw(c-49.779,12.721) R14.2@-50.36,12.14 ; v1@-49.841,10.548 ccw(c-50.183,10.889) -49.7,10.889 ccw(c-49.217,10.889) v1@-49.559,10.548 ; v1(-49.7,10.406) -49.7,11.9 ; R2.1@-49.04,11.66 ccw(c-49.621,11.079) -49.621,11.9 ccw(c-49.621,12.721) R2.1@-49.04,12.14 ; R2.1@-48.8,11.9 -49.7,11.9 ; v1(-26.736,8.9) IC2.31@-15,8.9 ; v1@-26.595,8.759 cw(c-26.253,8.417) -26.253,8.9 cw(c-26.253,9.383) v1@-26.595,9.041 ; IC2.31@-15.283,8.617 ccw(c-15.966,7.934) -15.966,8.9 ccw(c-15.966,9.866) IC2.31@-15.283,9.183
  Bottom Layer w0.2: v1@-49.7,10.206 cw(c-49.7,9.723) -49.359,10.065 cw(c-49.017,10.406) v1@-49.5,10.406 ; v1(-49.7,10.406) -48.194,8.9 v1(-26.736,8.9) ; v1@-26.878,8.759 ccw(c-27.219,8.417) -27.219,8.9 ccw(c-27.219,9.383) v1@-26.878,9.041
BOOT: IC2.3
CAN_HO: C27.1 D2.K J8.2 R15.1 U6.7 | length 41.1
  Top Layer w0.4: R15.1@-27.932,-30.183 ccw(c-28.342,-29.774) -27.762,-29.774 ccw(c-27.183,-29.774) R15.1@-27.593,-30.183 ; R15.1@-27.762,-30.593 cw(c-27.762,-31.172) -27.352,-30.763 cw(c-26.943,-30.353) R15.1@-27.522,-30.353 ; U6.7@-27.165,-24.55 -27.165,-26.098 -27.762,-26.695 R15.1@-27.762,-30.353 -26.594,-31.521 -25.879,-31.521 ; J8.2@-25.47,-32.921 ccw(c-26.951,-32.594) -25.879,-31.521 ; J8.2@-25.079,-33.007 ccw(c-26.105,-32.781) -25.362,-32.038 ccw(c-24.619,-31.295) J8.2@-24.393,-32.321 ; J8.2@-24.479,-31.93 cw(c-24.806,-30.449) -25.879,-31.521 ; J8.2@-24.2,-33.2 -25.879,-31.521
  Bottom Layer w0.4: D2.K@-25.495,-36.305 ccw(c-26.69,-35.11) -25,-35.11 ccw(c-23.31,-35.11) D2.K@-24.505,-36.305 ; D2.K@-25,-36.888 cw(c-22.012,-36.888) J8.2@-23.537,-34.318 ; D2.K@-25,-36.185 cw(c-22.429,-36.185) J8.2@-23.741,-33.974 ; -25,-35.483 cw(c-22.846,-35.483) J8.2@-23.945,-33.63 ; -25,-34.78 cw(c-23.262,-34.78) J8.2@-24.149,-33.286 ; D2.K@-24.65,-37.5 cw(c-24.65,-38.345) -24.053,-37.747 ; D2.K@-24.357,-36.864 ccw(c-23.489,-37.054) D2.K@-24.117,-37.683 ; J8.2@-24.2,-33.2 -25,-34 D2.K@-25,-36.8 -23.6,-38.2 ; D2.K@-23.966,-36.95 ccw(c-22.64,-37.24) -23.6,-38.2 ; C27.1@-22.57,-38.37 ccw(c-22.979,-38.779) -22.979,-38.2 ccw(c-22.979,-37.621) C27.1@-22.57,-38.03 ; C27.1@-22.4,-38.2 -23.6,-38.2
CAN_LO: C29.2 D1.K J8.1 J9.2 U6.6 | length 43.4
  Top Layer w0.4: J8.1@-30.12,-32.191 ccw(c-31.52,-30.468) -29.3,-30.468 ; J8.1@-29.868,-32.502 ccw(c-30.837,-31.309) -29.3,-31.309 ccw(c-27.763,-31.309) J8.1@-28.732,-32.502 ; J9.2@-29.429,-28.489 cw(c-30.368,-29.428) -29.04,-29.428 cw(c-27.712,-29.428) J9.2@-28.651,-28.489 ; J9.2@-29.407,-27.69 ccw(c-30.143,-26.869) -29.04,-26.869 ; J8.1@-29.3,-33.2 -29.3,-30.468 ; J9.2@-28.673,-27.69 cw(c-27.937,-26.869) -29.04,-26.869 ; J8.1@-28.48,-32.191 cw(c-27.08,-30.468) -29.3,-30.468 ; U6.6@-28.435,-24.55 -28.435,-26.264 -29.04,-26.869 ; -29.3,-30.468 -29.04,-30.208 J9.2@-29.04,-28.1 -29.04,-26.869
  Bottom Layer w0.4: C29.2@-31,-38.2 -29.8,-38.2 ; C29.2@-30.83,-38.37 cw(c-30.421,-38.779) -30.421,-38.2 cw(c-30.421,-37.621) C29.2@-30.83,-38.03 ; J8.1@-29.924,-34.341 cw(c-31.329,-36.911) D1.K@-28.4,-36.911 ; J8.1@-29.732,-33.99 cw(c-30.96,-36.236) D1.K@-28.4,-36.236 ; J8.1@-29.54,-33.639 cw(c-30.591,-35.561) -28.4,-35.561 ; D1.K@-29.434,-36.95 cw(c-30.76,-37.24) -29.8,-38.2 ; J8.1@-29.348,-33.288 cw(c-30.222,-34.887) -28.4,-34.887 ; -29.347,-37.747 cw(c-28.75,-38.345) D1.K@-28.75,-37.5 ; J8.1@-29.3,-33.2 -28.4,-34.1 D1.K@-28.4,-36.8 -29.8,-38.2 ; D1.K@-29.283,-37.683 ccw(c-29.911,-37.054) D1.K@-29.043,-36.864 ; D1.K@-28.895,-36.305 ccw(c-30.09,-35.11) -28.4,-35.11 ccw(c-26.71,-35.11) D1.K@-27.905,-36.305
CAN_RX: IC2.68 U6.4 | length 8.3
  Top Layer w0.2: U6.4@-29.846,-19.059 ccw(c-30.188,-18.717) -29.705,-18.717 ccw(c-29.222,-18.717) U6.4@-29.564,-19.059 ; U6.4@-29.705,-19.85 -29.705,-14.805 IC2.68@-29,-14.1 ; IC2.68@-29.4,-14.1 cw(c-30.366,-14.1) -29.683,-14.783 cw(c-29,-15.466) IC2.68@-29,-14.5
CAN_TX: IC2.67 U6.1 | length 11.3
  Top Layer w0.2: IC2.67@-29,-12.5 cw(c-29,-13.466) -28.317,-12.783 cw(c-27.634,-12.1) IC2.67@-28.6,-12.1 ; IC2.67@-29,-12.1 -27.965,-13.135 -27.965,-14.774 -25.895,-16.844 U6.1@-25.895,-19.85 ; U6.1@-26.036,-19.059 ccw(c-26.378,-18.717) -25.895,-18.717 ccw(c-25.412,-18.717) U6.1@-25.754,-19.059
DAC1: IC2.39
DAC2: IC2.40
DIR1: J10.3 R31.1 U10.6 | length 33.7
  Top Layer w0.3: -3.484,-26.009 ccw(c-4.192,-25.3) R31.1@-3.19,-25.3 ; R31.1@-3.182,-25.707 cw(c-2.9,-25.988) R31.1@-2.9,-25.59 ; R31.1@-3.105,-25.095 ccw(c-3.6,-24.6) -2.9,-24.6 ccw(c-2.2,-24.6) R31.1@-2.695,-25.095 ; J10.3@-0.09,-33.2 ccw(c-3.349,-33.2) -1.045,-30.895 ccw(c1.26,-28.591) J10.3@1.26,-31.85 ; J10.3@0.21,-33.2 ccw(c-2.325,-33.2) -0.532,-31.408 ccw(c1.26,-29.615) J10.3@1.26,-32.15 ; 0.221,-18.956 ccw(c-0.153,-18.582) U10.6@0.376,-18.582 ; J10.3@0.51,-33.2 ccw(c-1.301,-33.2) -0.02,-31.92 ccw(c1.26,-30.639) J10.3@1.26,-32.45 ; U10.6@1.242,-18.582 0.595,-18.582 -2.9,-22.077 R31.1@-2.9,-25.3 -2.9,-25.425 -3.69,-26.215 -3.69,-28.25 J10.3@1.26,-33.2
DIR2: J10.6 R33.1 U10.12 | length 45.1
  Top Layer w0.2: U10.12@6.83,-14.772 7.533,-14.772 9.474,-16.713 9.474,-23.374 R33.1@11.4,-25.3 15.191,-25.3 16.5,-26.609 J10.6@16.5,-33.2 ; U10.12@7.541,-14.977 cw(c7.541,-15.452) 7.877,-15.116 ; U10.12@7.746,-14.772 ccw(c8.26,-14.772) 7.897,-15.136 ; R33.1@11.06,-25.3 ccw(c10.239,-25.3) 10.82,-24.72 ccw(c11.4,-24.139) R33.1@11.4,-24.96 ; R33.1@11.64,-25.54 cw(c12.221,-26.121) 12.221,-25.3 cw(c12.221,-24.479) R33.1@11.64,-25.06 ; J10.6@15.51,-32.21 ccw(c13.12,-29.82) 16.5,-29.82 ccw(c19.88,-29.82) J10.6@17.49,-32.21 ; J10.6@15.651,-32.351 ccw(c13.603,-30.303) 16.5,-30.303 ccw(c19.397,-30.303) J10.6@17.349,-32.351 ; J10.6@15.793,-32.493 ccw(c14.086,-30.786) 16.5,-30.786 ccw(c18.914,-30.786) J10.6@17.207,-32.493 ; J10.6@15.934,-32.634 ccw(c14.569,-31.269) 16.5,-31.269 ccw(c18.431,-31.269) J10.6@17.066,-32.634
DIR3: J10.9 R35.1 U11.6 | length 41.2
  Top Layer w0.2: R35.1@26.7,-25.3 30.329,-25.3 31.74,-26.711 ; R35.1@26.94,-25.54 cw(c27.521,-26.121) 27.521,-25.3 cw(c27.521,-24.479) R35.1@26.94,-25.06 ; U11.6@28.753,-18.39 28.945,-18.582 29.936,-18.582 31.74,-20.386 31.74,-26.711 ; U11.6@29.853,-18.787 cw(c29.853,-19.481) 30.344,-18.99 ; U11.6@30.058,-18.582 ccw(c30.353,-18.582) 30.144,-18.791 ; J10.9@30.75,-32.21 ccw(c28.36,-29.82) 31.74,-29.82 ccw(c35.12,-29.82) J10.9@32.73,-32.21 ; J10.9@30.891,-32.351 ccw(c28.843,-30.303) 31.74,-30.303 ccw(c34.637,-30.303) J10.9@32.589,-32.351 ; J10.9@31.033,-32.493 ccw(c29.326,-30.786) 31.74,-30.786 ccw(c34.154,-30.786) J10.9@32.447,-32.493 ; J10.9@31.174,-32.634 ccw(c29.809,-31.269) 31.74,-31.269 ccw(c33.671,-31.269) J10.9@32.306,-32.634 ; J10.9@31.74,-33.2 31.74,-26.711
  Top Layer w0.254: U11.6@30.067,-18.655 ccw(c29.914,-18.567) U11.6@30.074,-18.491
DIR4: J10.12 R37.1 U11.12 | length 46.6
  Top Layer w0.2: U11.12@34.73,-14.772 35.219,-14.772 37.281,-16.834 37.281,-20.881 R37.1@41.7,-25.3 40.894,-26.106 40.894,-27.298 46.796,-33.2 J10.12@46.98,-33.2 ; U11.12@35.446,-14.772 ccw(c35.994,-14.772) 35.607,-15.16 ; U11.12@35.646,-14.772 ccw(c36.677,-14.772) 35.948,-15.501 ; R37.1@41.7,-25.64 ccw(c41.7,-26.461) 41.12,-25.88 ccw(c40.539,-25.3) 41.36,-25.3 ccw(c40.539,-25.3) 41.12,-24.72 ccw(c41.7,-24.139) R37.1@41.7,-24.96 ; 44.275,-30.68 ccw(c46.98,-27.975) J10.12@46.98,-31.8 ; 44.617,-31.021 ccw(c46.98,-28.658) J10.12@46.98,-32 ; 44.72,-31.125 cw(c42.645,-33.2) J10.12@45.58,-33.2 ; 44.958,-31.363 ccw(c46.98,-29.341) J10.12@46.98,-32.2 ; 45.062,-31.466 cw(c43.328,-33.2) J10.12@45.78,-33.2 ; 45.3,-31.704 ccw(c46.98,-30.024) J10.12@46.98,-32.4 ; 45.403,-31.807 cw(c44.011,-33.2) J10.12@45.98,-33.2 ; 45.641,-32.045 ccw(c46.98,-30.707) J10.12@46.98,-32.6 ; 45.745,-32.149 cw(c44.694,-33.2) J10.12@46.18,-33.2
ERR_LED: IC2.12 LED3.K | length 22.1
  Top Layer w0.2: IC2.12@-31,11.9 -29.845,13.055 -29.845,21.082 -27.229,23.698 -25.602,23.698 LED3.K@-23.8,25.5 ; IC2.12@-31,12.3 ccw(c-31,13.266) -30.317,12.583 ccw(c-29.634,11.9) IC2.12@-30.6,11.9 ; -24.995,24.305 cw(c-23.8,23.11) LED3.K@-23.8,24.8 ; -24.654,24.646 cw(c-23.8,23.793) LED3.K@-23.8,25 ; -24.312,24.988 cw(c-23.8,24.475) LED3.K@-23.8,25.2 ; -24.29,25.01 ccw(c-24.488,25.208) LED3.K@-24.208,25.208